# Altium PCB PCB_USB-TO_TTL_PCB_ADProject.pcbdoc
Units mil, origin at the board's own origin, x right, y up, seen from the top; angles counter-clockwise.
Board outline 4679 x 2307.1 mil, 2 copper layers (Top Layer, Bottom Layer); 25 components, 42 nets, 95 pads, 11 vias.
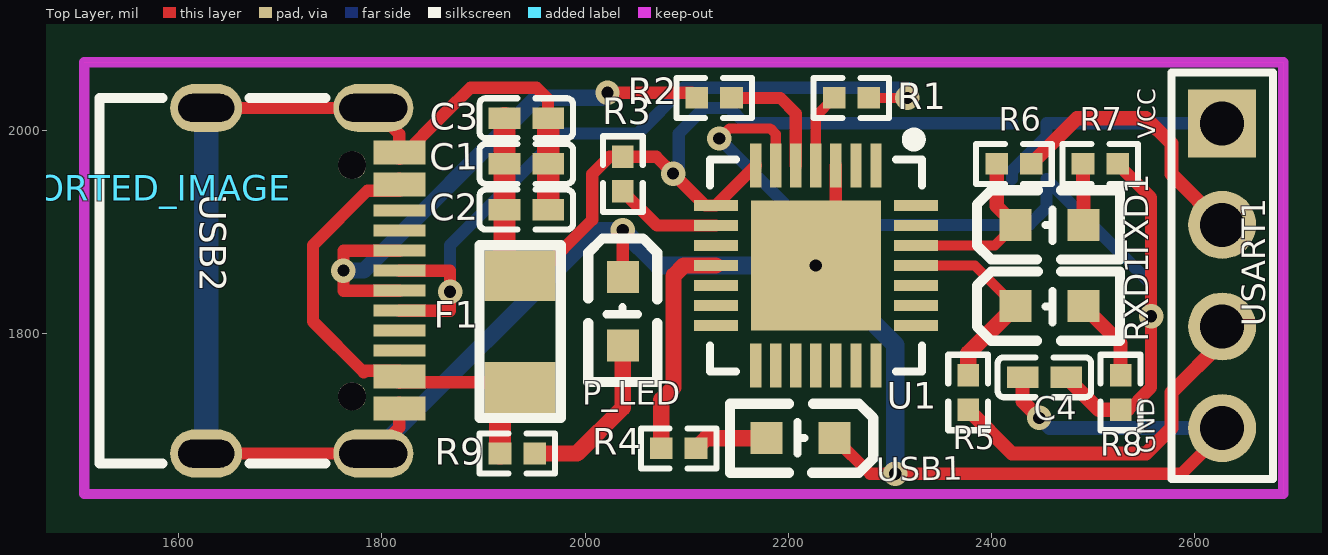
[diagram p0: Top Layer view]
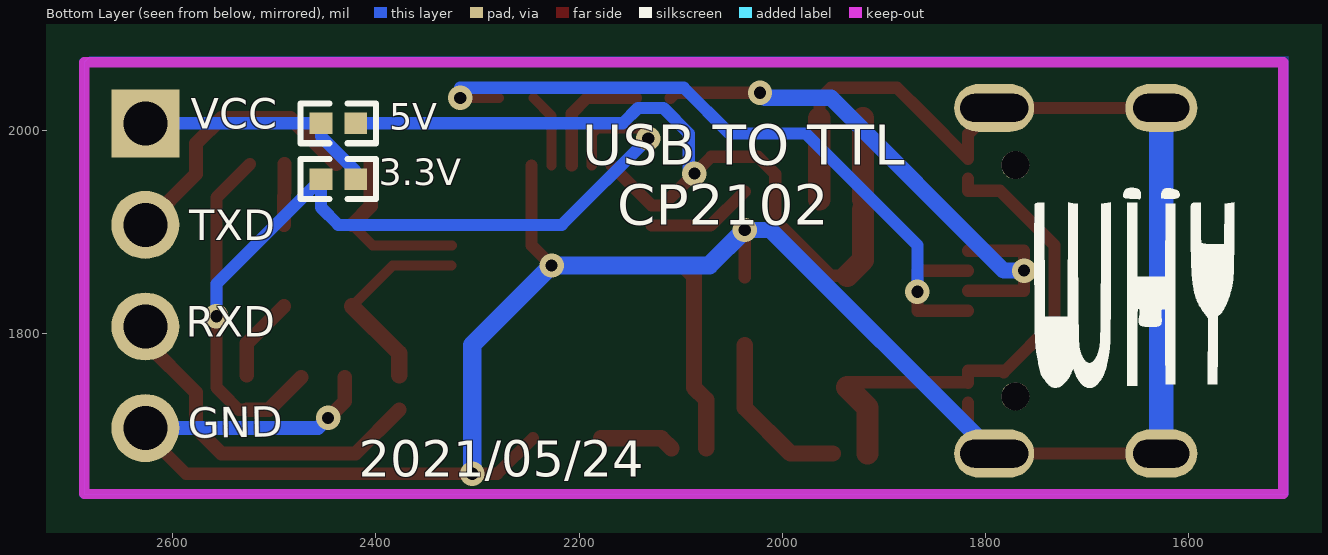
[diagram p1: Bottom Layer view, seen from below]

## Layer stack, top to bottom
Top Layer: signal copper (thickness not stored)
Dielectric: dielectric 12.6, FR-4, Dk 4.8
Bottom Layer: signal copper (thickness not stored)

## Board outline
5679,1000 1000,1000 1000,3307.1 5679,3307.1

## Components (designator, comment, footprint, x,y, rotation, side; value= is the part's Value field where it differs from the comment)
3.3V "0R" R0402#1 2437,1952 r0 bottom
5V "0R" R0402#1 2437,2007 r180 bottom
C1 "100nF" C0402 1942,1967 r180 top
C2 "100nF" C0402 1942,1922 r180 top
C3 "10uf" C0402 1942,2012 r180 top
C4 "1uf" C0402 2452,1757 r180 top
F1 "PPTC-1.1A-6V-1206" F1206 1935.99,1802 r90 top
IMPORTED_IMAGE "IMPORTED_IMAGE" IMPORTED_IMAGE 1555,1943.4 r0 top
P_LED "Power" LED0603-R-RD 2037,1822 r270 top
R1 "22R" R0402#2 2262,2032 r180 top
R2 "22R" R0402#2 2127,2032 r0 top
R3 "4.7K" R0402#2 2037,1957 r270 top
R4 "10K" R0402#2 2092,1687 r180 top
R5 "0R" R0402#2 2377,1742 r270 top
R6 "0R" R0402#2 2422,1967 r0 top
R7 "10K" R0402#2 2507,1967 r0 top
R8 "10K" R0402#2 2527,1742 r270 top
R9 "10K" R0402#2 1933.16,1682 r0 top
RXD1 "RXD" LED0603-R-RD 2457,1827 r0 top
TXD1 "TXD" LED0603-R-RD 2457,1907 r0 top
U1 "CP2102N-A01-GQFN28" QFN-28_L5.0-W5.0-P0.50-BL-EP3.3 2227,1867 r180 top
USART1 "Header-Male-2.54_1x4_C59481" HDR-TH_4P-P2.54-V 2627,1857 r270 top
USB1 "USB" LED0603-R-RD 2212,1697 r180 top
USB2 "KH-TYPE-C-16P" USB-C-SMD_KH-TYPE-C-16P 1722,1852 r270 top
? "" ? 3339.5,2153.55 r0 top

## Footprints (in the part's own frame and the unit in brackets; to place one, negate y for a bottom-side part, rotate by r counter-clockwise, add the part's x,y. Pads: shape width x height; smd on the part's side, far side on the other; paste and mask are expansions set on the pad)
C0402 [mm]
  rect 0.79x0.54 smd: 1(-0.545,0) 2(0.545,0)
  silkscreen extent -1.17,-0.5 1.17,0.5
F1206 [mil]
  rect 50x70 smd: 1(-55,0) 2(55,0)
  silkscreen extent -85,-40 85,40
HDR-TH_4P-P2.54-V [mm]
  rect 1.7x1.7 hole 1.1: 1(-3.81,0)
  round 1.7 hole 1.1: 2(-1.27,0) 3(1.27,0) 4(3.81,0)
  silkscreen extent -5.08,-1.27 5.08,1.27
IMPORTED_IMAGE [mil]
LED0603-R-RD [mm]
  rect 0.8x0.8 smd: 1(0.851,0) 2(-0.851,0)
  silkscreen extent -1.82,-0.86 1.77,0.86
QFN-28_L5.0-W5.0-P0.50-BL-EP3.3 [mm]
  rect 0.28x1.1 smd: 1(-1.501,-2.5) 2(-1.001,-2.5) 3(-0.501,-2.5) 4(0,-2.5) 5(0.5,-2.5) 6(1.001,-2.5) 7(1.501,-2.5) 15(1.501,2.5) 16(1.001,2.5) 17(0.5,2.5) 18(0,2.5) 19(-0.501,2.5) 20(-1.001,2.5) 21(-1.501,2.5)
  rect 1.1x0.28 smd: 8(2.5,-1.501) 9(2.5,-1.001) 10(2.5,-0.501) 11(2.5,0) 12(2.5,0.5) 13(2.5,1.001) 14(2.5,1.501) 22(-2.5,1.501) 23(-2.5,1.001) 24(-2.5,0.5) 25(-2.5,0) 26(-2.5,-0.501) 27(-2.5,-1.001) 28(-2.5,-1.501)
  rect 3.25x3.25 smd: 29(0,0)
  silkscreen extent -2.65,-3.3 2.65,2.65
R0402#1 [mm]
  rect 0.566x0.54 smd: 1(0.433,0) 2(-0.433,0)
  silkscreen extent -0.94,-0.5 0.94,0.5
R0402#2 [mm]
  rect 0.566x0.54 smd: 1(-0.433,0) 2(0.433,0)
  silkscreen extent -0.94,-0.5 0.94,0.5
USB-C-SMD_KH-TYPE-C-16P [mm]
  oval 1.2x2 hole 0.7 slot 1.7 at 90 deg: 1(-4.32,1.765) 2(4.32,1.765)
  oval 1.2x1.8 hole 0.7 slot 1.4 at 90 deg: 3(-4.32,-2.415) 4(4.32,-2.415)
  rect 0.3x1.3 smd: A1(-3.35,2.415) A4(-2.55,2.415) A5(-1.25,2.415) A6(-0.25,2.415) A7(0.25,2.415) A8(1.25,2.415) A9(2.55,2.415) A12(3.35,2.415) B1(3.05,2.415) B4(2.25,2.415) B5(1.75,2.415) B6(0.75,2.415) B7(-0.75,2.415) B8(-1.75,2.415) B9(-2.25,2.415) B12(-3.05,2.415)
  round 0.7 hole 0.7 unplated: ""(-2.89,1.235) ""(2.89,1.235)
  silkscreen extent -4.57,-5.08 4.57,0.57
? [mil]

## Via types
v1: diameter 24, hole 12, Top Layer to Bottom Layer, 11 vias

## Nets (pads, with @x,y where several pads share a name; then routed paths per layer and width w, separated by ;. In a path a pad name is that pad's centre, name@x,y a point inside that pad or via, vN(x,y) a via of type N, cw(c..) or ccw(c..) an arc to the next point about the centre after c; other vN are vias at no path point)
5V: 5V.1 C1.2 C2.2 C3.2 F1.2 R3.1 U1.7 U1.8 | length 880.7
  Top Layer w12.01: F1.2 1952,1857 2007,1912 2007,1957 2024.04,1974.04 R3.1 2069.96,1974.04 v1(2086.52,1957.48) 2117.9,1926.1 U1.8 U1.7
  Top Layer w22.05: C2.2 1920.54,1872.45 F1.2 ; C2.2@1920.54,1932 C3.2
  Bottom Layer w12.01: v1(2086.52,1957.48) 2092,1963 2092,1997 2117,2022 2142,2022 2157,2007 5V.1
+5V: F1.1 R9.1 USB2.A4 USB2.A9 USB2.B4 USB2.B9 | length 521.3
  Top Layer w12.01: USB2.A9@1817.1,1752 1936,1752 F1.1 ; USB2.B4 1783.4,1763.4 1782,1762 1732,1812 1732,1887 1785.6,1940.6 USB2.B9 USB2.A4 ; USB2.A9 USB2.B4 USB2.A9
  Top Layer w22.05: R9.1 1916.12,1727.13 F1.1
CP2102_3.3V: 3.3V.1 C4.1 R7.2 R8.2 U1.6 | length 1002.5
  Top Layer w10: v1(2132,1992) 2142,2002 2182,2002 2187.61,1996.39 U1.6
  Top Layer w12.01: R7.2 2557,1934.04 v1(2557,1817) 2557,1747 2552,1742 2534.96,1724.96 R8.2
  Top Layer w14.02: C4.1 2505.5,1724.96 R8.2
  Bottom Layer w12.01: v1(2132,1992) 2217,1907 2437,1907 2454.04,1924.04 3.3V.1 2557,1849.04 v1(2557,1817)
GND: C1.1 C2.1 C3.1 C4.2 P_LED.2 U1.3 U1.29 USART1.4 USB1.2 USB2.1 USB2.2 USB2.3 USB2.4 USB2.A1 USB2.A12 USB2.B1 USB2.B12 | length 2649.3
  Top Layer w12.01: USB2.4 USB2.2 1817.08,1707.51 USB2.B1 ; USB2.3 USB2.1 1817.08,1996.49 USB2.B12 1862,2017 1887,2042 1952,2042 1963.5,2030.5 C3.1 ; P_LED.2 v1(2037,1902) ; v1(2227.01,1867) 2246.7,1886.7 U1.3 ; USB1.2 2280.5,1662 v1(2305.23,1662) 2587,1662 2627,1702 USART1.4
  Top Layer w14.02: C4.2 2430.54,1733.46 v1(2447,1717)
  Top Layer w22.05: C2.1@1963.46,1932 C3.1
  Bottom Layer w14.02: v1(2447,1717) 2457,1707 USART1.4
  Bottom Layer w16.02: USB2.2 2011.57,1902 v1(2037,1902)
  Bottom Layer w18.03: v1(2037,1902) 2071.99,1867.01 v1(2227.01,1867) 2305.23,1788.78 v1(2305.23,1662)
  Bottom Layer w24.05: USB2.4 USB2.3
P_LED_1: P_LED.1 R9.2 | length 166.9
  Top Layer w16.02: R9.2 1992,1682 2037,1727 P_LED.1
RXD: R5.1 RXD1.2 U1.25 | length 201.9
  Top Layer w10: U1.25 2383.49,1867.01 RXD1.2
  Top Layer w16.02: R5.1 2377,1780.5 RXD1.2
RXD1_1: R8.1 RXD1.1 | length 83.1
  Top Layer w14.02: RXD1.1 2527,1790.5 R8.1
RXD_1: R5.2 USART1.3 | length 348.9
  Top Layer w14.02: R5.2 2420,1682 2552,1682 2577,1707 2577,1742 2627,1792 USART1.3
S$1165: 
TXD: R6.1 TXD1.2 U1.26 | length 174.2
  Top Layer w10: U1.26 2403.2,1886.7 TXD1.2
  Top Layer w14.02: R6.1 2404.96,1925.54 TXD1.2
TXD1_1: R7.1 TXD1.1 | length 60
  Top Layer w14.02: R7.1 TXD1.1
TXD_1: R6.2 USART1.2 | length 267.7
  Top Layer w14.02: R6.2 2484.04,2012 2552,2012 2577,1987 2577,1957 USART1.2
U1_1: U1.1
U1_2: U1.2
U1_4: R1.2 U1.4 | length 74
  Top Layer w10: U1.4 2227.01,2014.05 R1.2
U1_5: R2.2 U1.5 | length 120.9
  Top Layer w12.01: R2.2 2192,2032 2207.3,2016.7 U1.5
U1_9: R3.2 U1.9 | length 105.5
  Top Layer w12.01: R3.2 2070.56,1906.4 U1.9
U1_10: U1.10
U1_11: R4.2 U1.11 | length 220.7
  Top Layer w16.02: R4.2 2074.96,1734.96 2087,1747 2087,1857 2097.01,1867.01 U1.11
U1_12: U1.12
U1_13: U1.13
U1_14: U1.14
U1_15: U1.15
U1_16: U1.16
U1_17: U1.17
U1_18: U1.18
U1_19: U1.19
U1_20: U1.20
U1_21: U1.21
U1_22: U1.22
U1_23: U1.23
U1_24: U1.24
U1_27: U1.27
U1_28: U1.28
USART1_1: 3.3V.2 5V.2 USART1.1 | length 242.1
  Bottom Layer w12.01: 3.3V.2 2419.96,1959.96 2454.04,1994.04 5V.2 USART1.1
USB1_1: R4.1 USB1.1 | length 73.6
  Top Layer w16.02: R4.1 2119.04,1697 USB1.1
USB2_A5: USB2.A5
USB2_A8: USB2.A8
USB2_B5: USB2.B5
USB2_B8: USB2.B8
USB_DN: R2.1 USB2.A7 USB2.B7 | length 572
  Top Layer w12.01: USB2.A7 1762,1842.2 v1(1762,1862) 1762,1881.5 USB2.B7 ; v1(2022,2037) 2104.96,2037 R2.1
  Bottom Layer w16.02: v1(1762,1862) 1782,1862 1952,2032 2017,2032 v1(2022,2037)
USB_DP: R1.1 USB2.A6 USB2.B6 | length 747.1
  Top Layer w10: R1.1 v1(2317,2032)
  Top Layer w12.01: USB2.B6 1867,1822.5 v1(1867,1841.2) 1867,1861.8 USB2.A6
  Bottom Layer w12.01: v1(1867,1841.2) 1867,1887 1977,1997 2052,1997 2097,2042 2317,2042 v1(2317,2032)
pads on no net: USB2.

## Polygon pours and split planes (outlines as drawn)
GND on Top Layer (solid): 1507,2067 2687,2067 2687,1642 1507,1642 1507,2067
GND on Bottom Layer (solid): 1502,2072 2682,2072 2687,2067 2687,1642 1502,1642 1502,2072

## Silkscreen, mask and mechanical layers (free items; w line width, h text height)
Top Overlay:
  text "VCC" at 2567,1992 h29.53 r90
  text "GND" at 2567,1682 h29.53 r91
Bottom Overlay:
  text "VCC" at 2582,1992 h51.18
  text "USB TO TTL /   CP2102" at 2197,1907.32 h39.37
  text "TXD" at 2583.5,1882 h51.18
  text "RXD" at 2587,1787 h51.18
  text "GND" at 2584.9,1687 h51.18 r359
  text "2021/05/24" at 2417,1659.28 h35.43